# Altium PCB CW308T_PSoC62.PcbDoc
Units mil, origin at the board's own origin, x right, y up, seen from the top; angles counter-clockwise.
Board outline 2055 x 2540 mil, 2 copper layers (Top Layer, Bottom Layer); 22 components, 27 nets, 233 pads, 38 vias.
Unrouted connection lines stored in the file: 2.
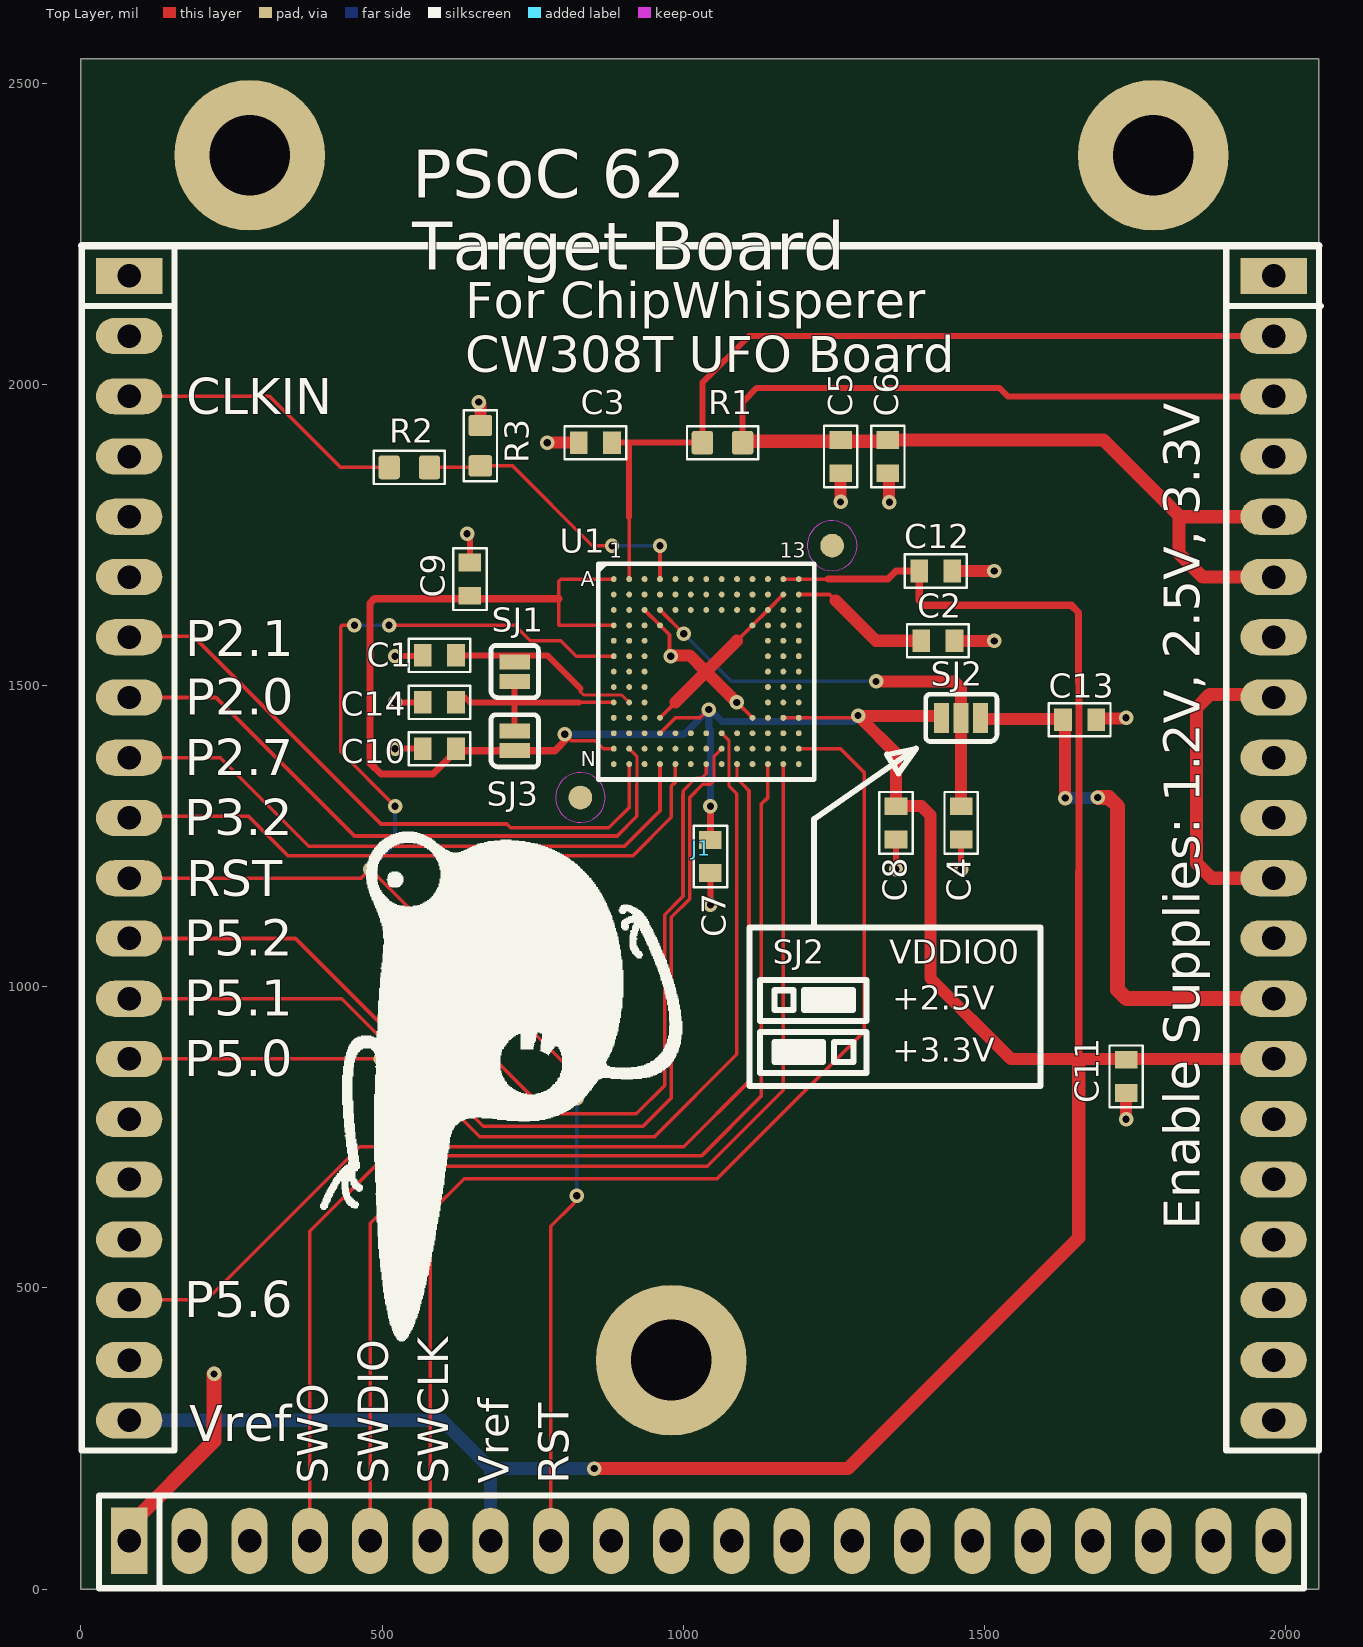
[diagram p0: Top Layer view]
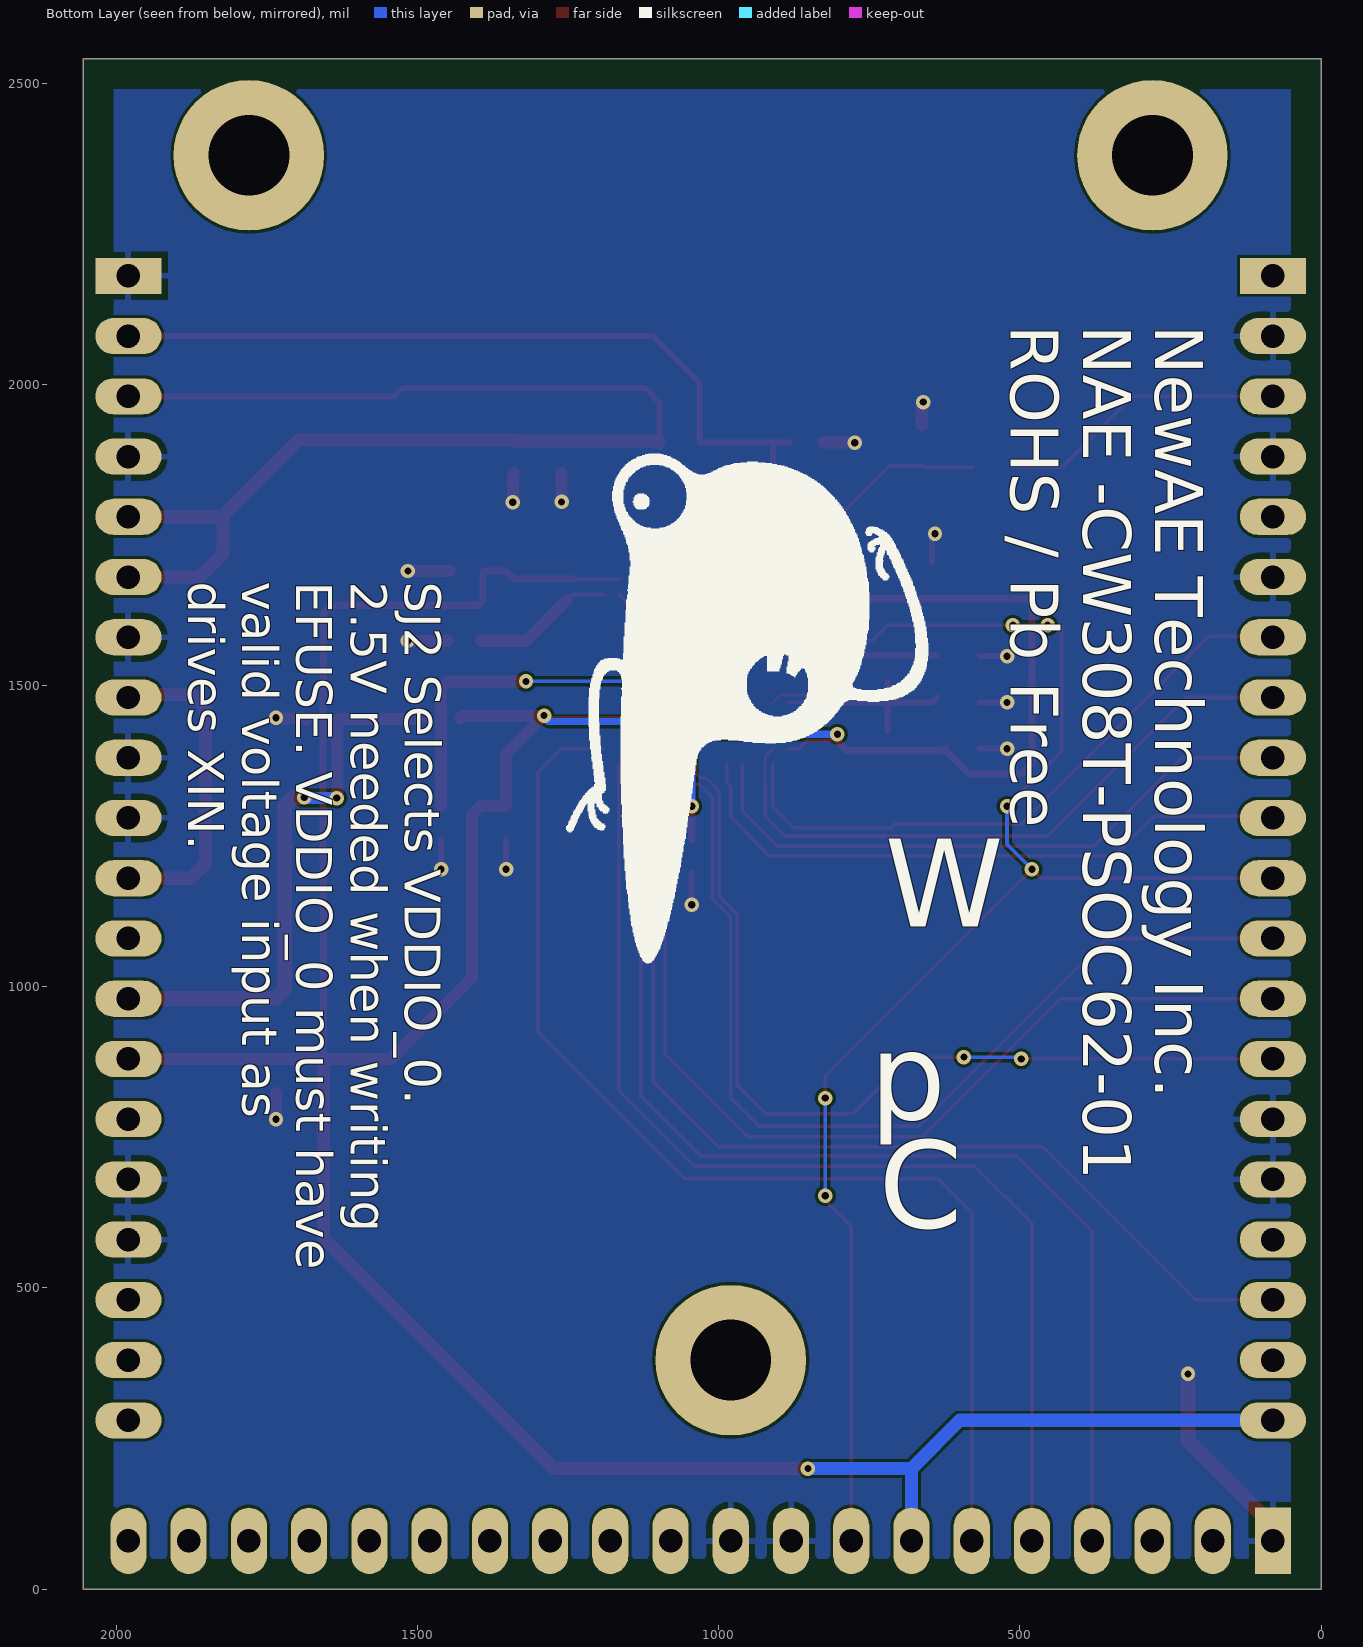
[diagram p1: Bottom Layer view, seen from below]

## Layer stack, top to bottom
Top Solder: solder mask 0.4, Solder Resist, Dk 3.5
Top Layer: signal copper 1.4
Dielectric 1: dielectric 12.6, FR-4, Dk 4.8
Bottom Layer: signal copper 1.4
Bottom Solder: solder mask 0.4, Solder Resist, Dk 3.5

## Board outline
0,0 0,2540 2055,2540 2055,0

## Design rules (kind name [scope] priority, off if disabled: settings)
BoardOutlineClearance Silk_to_Outline [(OnLayer('Top Overlay'))] p1: gap=0 ignorepadtopadclearanceinfootprint=FALSE
BoardOutlineClearance [All] p2: gap=50 ignorepadtopadclearanceinfootprint=FALSE
Clearance [All] p1: gap=5 ignorepadtopadclearanceinfootprint=FALSE except(0: Arc-Hole Track-Hole SMDPad-Hole THPad-Hole Via-Hole Fill-Hole Poly-Hole Region-Hole Text-Hole)
HoleSize [All] p1: absolutevalues=TRUE maxlimit=200 minlimit=1 maxpercent=80.000 minpercent=20.000
MinimumSolderMaskSliver [All] p1: minsoldermaskwidth=5
PlaneConnect PlaneConnect_viaDirect [IsVia] p1: planeconnectstyle=Direct reliefexpansion=20 reliefentries=4 reliefconductorwidth=10 reliefairgap=10
PlaneConnect [All] p2: planeconnectstyle=Relief reliefexpansion=20 reliefentries=4 reliefconductorwidth=10 reliefairgap=10
PolygonConnect PolygonConnect_viaDirect [All vs isVia] p1: connectstyle=Direct reliefconductorwidth=10 reliefentries=4 polygonreliefangle="90 Angle" airgapwidth=10
PolygonConnect [All] p2: connectstyle=Relief reliefconductorwidth=10 reliefentries=4 polygonreliefangle="90 Angle" airgapwidth=10
RoutingVias [All] p1: holewidth=28 width=50 viastyle="Through Hole" minholewidth=12 minwidth=11.81 maxholewidth=28 maxwidth=300 useviatemplates=TRUE viatemplateguid#1={883BC67F-0BAB-4236-9748-A0FFC80E06F3} viatemplateguid#2={EC4B1443-3223-4F3C-BEE6-1F1A4B72CE8F} viatemplateguid#3={1AFF5C45-7DD9-4486-91C1-9BFD7A8408A9} viatemplatename#1=v61h30m0mx0 viatemplatename#2=v86h41m0mx0 viatemplatename#3=v127h71m0mx0
SilkToSilkClearance [All] p1: silktosilkclearance=5
SilkToSolderMaskClearance [IsPad] p1: minsilkscreentomaskgap=5 clearancetoexposedcopper=TRUE
SolderMaskExpansion [All] p1: expansion=4
Width [All] p1: maxlimit=100 minlimit=5 preferedwidth=10 minimp=50.000000 maximp=50.000000 favimp=50.000000
25 further rules are at their usual default settings.

## Classes and differential pairs
component class CW308T_PSoC62_UFO: J1 R2 R3
component class CW308T_PSoC62_MCU: C1 C2 C3 C4 C5 C6 C7 C8 C9 C10 C11 C12 C13 C14 R1 SJ1 SJ2 SJ3 U1

## Components (designator, comment, footprint, x,y, rotation, side; value= is the part's Value field where it differs from the comment)
C1 "100n" CAPC0603_M 595,1550 r180 top
C2 "100n" CAPC0603_M 1422.44,1574.18 r0 top
C3 "DNM" CAPC0603_M 853.95,1903 r180 top
C4 "100n" CAPC0603_M 1461,1272.05 r270 top
C5 "100n" CAPC0603_M 1260.95,1880 r270 top
C6 "2u2" CAPC0603_M 1339.54,1880 r270 top
C7 "100n" CAPC0603_M 1045,1216 r270 top
C8 "100n" CAPC0603_M 1353,1272.05 r270 top
C9 "100n" CAPC0603_M 645.74,1676.54 r90 top
C10 "100n" CAPC0603_M 595,1395.05 r180 top
C11 "2u2" CAPC0603_M 1735,851 r270 top
C12 "2u2" CAPC0603_M 1419,1690 r0 top
C13 "2u2" CAPC0603_M 1658,1443 r0 top
C14 "100n" CAPC0603_M 595,1471.82 r180 top
J1 "CW308_TARGETCON" CW308_TBOARD_CONN 80,2180 r0 top locked
R1 "10R" RESC1608X55N 1065,1903 r0 top
R2 "22R" RESC1608X55N 545,1862 r180 top
R3 "100R" RESC1608X55N 663,1898 r270 top
SJ1 "NO" SJ_2S_NO 720,1523 r90 top
SJ2 "NC" SJ_3S_NC12 1461,1446.23 r180 top
SJ3 "NO" SJ_2S_NO 720,1408 r90 top
U1 "CY8C6246BZI-D04" BGA124C65P13X13_900X900X100 1038,1523 r0 top

## Footprints (in the part's own frame and the unit in brackets; to place one, negate y for a bottom-side part, rotate by r counter-clockwise, add the part's x,y. Pads: shape width x height; smd on the part's side, far side on the other; paste and mask are expansions set on the pad)
BGA124C65P13X13_900X900X100 [mm]
  round 0.25 smd mask+0.05: A1(-3.9,3.9) A2(-3.25,3.9) A3(-2.6,3.9) A4(-1.95,3.9) A5(-1.3,3.9) A6(-0.65,3.9) A7(0,3.9) A8(0.65,3.9) A9(1.3,3.9) A10(1.95,3.9) A11(2.6,3.9) A12(3.25,3.9) A13(3.9,3.9) B1(-3.9,3.25) B2(-3.25,3.25) B3(-2.6,3.25) B4(-1.95,3.25) B5(-1.3,3.25) B6(-0.65,3.25) B7(0,3.25) B8(0.65,3.25) B9(1.3,3.25) B10(1.95,3.25) B11(2.6,3.25) B12(3.25,3.25) B13(3.9,3.25) C1(-3.9,2.6) C2(-3.25,2.6) C3(-2.6,2.6) C4(-1.95,2.6) C5(-1.3,2.6) C6(-0.65,2.6) C7(0,2.6) C8(0.65,2.6) C9(1.3,2.6) C10(1.95,2.6) C11(2.6,2.6) C12(3.25,2.6) C13(3.9,2.6) D1(-3.9,1.95) D2(-3.25,1.95) D3(-2.6,1.95) D4(-1.95,1.95) D10(1.95,1.95) D11(2.6,1.95) D12(3.25,1.95) D13(3.9,1.95) E1(-3.9,1.3) E2(-3.25,1.3) E3(-2.6,1.3) E11(2.6,1.3) E12(3.25,1.3) E13(3.9,1.3) F1(-3.9,0.65) F2(-3.25,0.65) F3(-2.6,0.65) F11(2.6,0.65) F12(3.25,0.65) F13(3.9,0.65) G1(-3.9,0) G2(-3.25,0) G3(-2.6,0) G11(2.6,0) G12(3.25,0) G13(3.9,0) H1(-3.9,-0.65) H2(-3.25,-0.65) H3(-2.6,-0.65) H11(2.6,-0.65) H12(3.25,-0.65) H13(3.9,-0.65) J1(-3.9,-1.3) J2(-3.25,-1.3) J3(-2.6,-1.3) J11(2.6,-1.3) J12(3.25,-1.3) J13(3.9,-1.3) K1(-3.9,-1.95) K2(-3.25,-1.95) K3(-2.6,-1.95) K4(-1.95,-1.95) K10(1.95,-1.95) K11(2.6,-1.95) K12(3.25,-1.95) K13(3.9,-1.95) L1(-3.9,-2.6) L2(-3.25,-2.6) L3(-2.6,-2.6) L4(-1.95,-2.6) L5(-1.3,-2.6) L6(-0.65,-2.6) L7(0,-2.6) L8(0.65,-2.6) L9(1.3,-2.6) L10(1.95,-2.6) L11(2.6,-2.6) L12(3.25,-2.6) L13(3.9,-2.6) M1(-3.9,-3.25) M2(-3.25,-3.25) M3(-2.6,-3.25) M4(-1.95,-3.25) M5(-1.3,-3.25) M6(-0.65,-3.25) M7(0,-3.25) M8(0.65,-3.25) M9(1.3,-3.25) M10(1.95,-3.25) M11(2.6,-3.25) M12(3.25,-3.25) M13(3.9,-3.25) N1(-3.9,-3.9) N2(-3.25,-3.9) N3(-2.6,-3.9) N4(-1.95,-3.9) N5(-1.3,-3.9) N6(-0.65,-3.9) N7(0,-3.9) N8(0.65,-3.9) N9(1.3,-3.9) N10(1.95,-3.9) N11(2.6,-3.9) N12(3.25,-3.9) N13(3.9,-3.9)
  round 1 smd mask+0.5: ""(-5.309,-5.309) ""(5.309,5.309)
  Top Layer keep-out circle w0.05: c-5.309,-5.309 r1.051
  Top Layer keep-out circle w0.05: c5.309,5.309 r1.051
  silkscreen extent -4.55,-4.55 4.55,4.55, body extent -4.55,-4.55 4.55,4.55, height 1
CAPC0603_M [mm]
  rect 0.75x0.95 smd: 1(-0.7,0) 2(0.7,0)
  silkscreen extent -1.3,-0.7 1.3,0.7, body extent -0.85,-0.45 0.85,0.45, height 0.9
CW308_TBOARD_CONN [mil]
  rect 110x60 hole 39: A1(0,0) C1(1900,0)
  oval 110x60 hole 39: A2(0,-100) A3(0,-200) A4(0,-300) A5(0,-400) A6(0,-500) A7(0,-600) A8(0,-700) A9(0,-800) A10(0,-900) A11(0,-1000) A12(0,-1100) A13(0,-1200) A14(0,-1300) A15(0,-1400) A16(0,-1500) A17(0,-1600) A18(0,-1700) A19(0,-1800) A20(0,-1900) C2(1900,-100) C3(1900,-200) C4(1900,-300) C5(1900,-400) C6(1900,-500) C7(1900,-600) C8(1900,-700) C9(1900,-800) C10(1900,-900) C11(1900,-1000) C12(1900,-1100) C13(1900,-1200) C14(1900,-1300) C15(1900,-1400) C16(1900,-1500) C17(1900,-1600) C18(1900,-1700) C19(1900,-1800) C20(1900,-1900)
  rect 60x110 hole 39: B1(0,-2100)
  oval 60x110 hole 39: B2(100,-2100) B3(200,-2100) B4(300,-2100) B5(400,-2100) B6(500,-2100) B7(600,-2100) B8(700,-2100) B9(800,-2100) B10(900,-2100) B11(1000,-2100) B12(1100,-2100) B13(1200,-2100) B14(1300,-2100) B15(1400,-2100) B16(1500,-2100) B17(1600,-2100) B18(1700,-2100) B19(1800,-2100) B20(1900,-2100)
  round 250 hole 134: MH1(200,200) MH2(900,-1800) MH2(1700,200)
  silkscreen extent -79,-2179 1979,50, body extent -50,-2149 1950,50, height 48
RESC1608X55N [mm] "Chip Resistor, Body 1.6x0.8mm, EIA 0603, IPC Medium Density"
  round 0.254 on Mech15: 0(0,0)
  rrect25% 0.9x1 smd: 1(-0.85,0) 2(0.85,0)
  Top Layer pour cut-out: -0.6,0.5 0.6,0.5 0.6,-0.5 -0.6,-0.5
  silkscreen extent -1.5,-0.7 1.5,0.7, body extent -0.87,-0.47 0.88,0.48, height 0.54
SJ_2S_NO [mil] "Solder Jumper, open (no paste)"
  rect 25x50 smd paste-393.7: 1(-16.22,0) 2(16.22,0)
  silkscreen extent -43,-39 43,39
SJ_3S_NC12 [mil] "3-Way Solder Jumper, pads 1-2 closed"
  rect 25x50 smd: 1(-32.43,0) 2(0,0)
  rect 25x50 smd paste-393.7: 3(32.44,0)
  silkscreen extent -60,-39 59,39

## Part data
C1 C2 C4 C5 C7 C8 C9 C10 C14: library part CCHIP-100n-0603, "100n, 0603", Case-EIA=0603, Case-Metric=1608, Manufacture 1=Kemet, Manufacture Part Number 1=C0603C104K5RACTU, Rated Voltage=50VDC, Supplier Part Number 1=399-5089-2-ND, Component Group=Capacitor, Component Type=Standard, Mounting Technology=SMT, Part Number=CCHIP-100n-0603, Pin Count=2, Supplier 1=Digi-Key
C3: library part CCHIP-DNM-0603, "DNM, 0603", Case-EIA=0603, Component Group=Capacitor, Component Type=Standard, Mounting Technology=SMT, Part Number=CCHIP-DNM-0603, Pin Count=2
C6 C11 C12 C13: library part CCHIP-2u2-0603, "2u2, 0603", Case-EIA=0603, Case-Metric=1608, Manufacture 1=Samsung, Manufacture Part Number 1=CL10B225KP8NNNC, Rated Voltage=10VDC, Supplier Part Number 1=1276-1134-2-ND, Component Group=Capacitor, Component Type=Standard, Mounting Technology=SMT, Part Number=CCHIP-2u2-0603, Pin Count=2, Supplier 1=Digi-Key
J1: library part CW308_TBOARD, "CW308 \"Standard\" Target Board Connector", Component Group=Mechanical, Component Type=Standard, Mounting Technology=Through-hole, Part Number=CW308_TBOARD, Pin Count=60, Pitch=2.54mm
R1: library part RCHIP-10R-0603, "10R res, 0603, 1%, 1/10W", Case-EIA=0603, Case-Metric=1608, Manufacture 1=Yageo, Manufacture Part Number 1=RC0603FR-0710RL, Rated Power=0.1W, Rated Voltage=75VDC, Supplier Part Number 1=311-10.0HRCT-ND, Temperature Range="-55C to 155C", Tolerance=1%, Component Group=Resistor, Component Type=Standard, Mounting Technology=SMT, Part Number=RCHIP-10R-0603, Pin Count=2, Supplier 1=Digi-Key
R2: library part RCHIP-22R-0603, "22R res, 0603, 1%, 1/10W", Case-EIA=0603, Case-Metric=1608, Manufacture 1=Yageo, Manufacture Part Number 1=RC0603FR-0722RL, Rated Power=0.1W, Rated Voltage=75VDC, Supplier Part Number 1=311-22.0HRCT-ND, Temperature Range="-55C to 155C", Tolerance=1%, Component Group=Resistor, Component Type=Standard, Mounting Technology=SMT, Part Number=RCHIP-22R-0603, Pin Count=2, Supplier 1=Digi-Key
R3: library part RCHIP-100R-0603, "100R res, 0603, 1%, 1/10W", Case-EIA=0603, Case-Metric=1608, Manufacture 1=Yageo, Manufacture Part Number 1=RC0603FR-07100RL, Rated Power=0.1W, Rated Voltage=75VDC, Supplier Part Number 1=311-100HRCT-ND, Temperature Range="-55C to 155C", Tolerance=1%, Component Group=Resistor, Component Type=Standard, Mounting Technology=SMT, Part Number=RCHIP-100R-0603, Pin Count=2, Supplier 1=Digi-Key
SJ1 SJ3: library part SJ_2S_NO, "Solder Jumper, NO", Component Group="PCB Feature", Component Type="Standard (No BOM)", Mounting Technology=COPPER, Part Number=SJ_2S_NO, Pin Count=2
SJ2: library part SJ_3S_12JMP, "Solder Jumper, NC", Component Group="PCB Feature", Component Type="Standard (No BOM)", Mounting Technology=COPPER, Part Number=SJ_3S_12JMP, Pin Count=3
U1: "IC DUAL CORE MCU 32B 512K 124BGA", Manufacture 1="Cypress Semiconductors", Component Group="Digital IC", Component Type=Standard, Manufacture Part Number 1=CY8C6246BZI-D04, Mounting Technology=SMT, Part Number=CY8C6246BZI-D04, Pin Count=124, PP Material Stack=0, PP Rotation=0, RoHS=Yes, Supplier 1=Digi-Key, Supplier Part Number 1=CY8C6246BZI-D04

## Via types
v1: diameter 24, hole 12, Top Layer to Bottom Layer, tented both sides, 38 vias

## Nets (pads, with @x,y where several pads share a name; then routed paths per layer and width w, separated by ;. In a path a pad name is that pad's centre, name@x,y a point inside that pad or via, vN(x,y) a via of type N, cw(c..) or ccw(c..) an arc to the next point about the centre after c; other vN are vias at no path point)
CS: J1.A18 U1.N9 | length 1714.3
  Top Layer w5: U1.N9 1089.18,1345.13 1098.46,1335.84
  Top Layer w6: J1.A18 209,480 463,734 1000.41,734 1109,842.59 1109,1325.31 1098.46,1335.84
GND: C1.2 C2.2 C3.2 C4.2 C5.2 C6.2 C7.2 C8.2 C9.2 C10.2 C11.2 C12.2 C13.2 C14.2 J1.A2 J1.A4 J1.A6 J1.A15 J1.A16 J1.B1 J1.B9 J1.B10 J1.C1 J1.C4 J1.C7 J1.C9 J1.C10 J1.C16 J1.C17 R3.1 U1.B12 U1.C3 U1.C11 U1.D4 U1.D10 U1.K4 U1.K10 | length 1658.5
  Top Layer w6: U1.C3 U1.D4 977,1584 v1@977,1550 ; U1.K4 986.82,1471.82 ; 1088.62,1574.18 1089.18,1574.18 U1.D10 U1.C11 U1.B12 ; v1@1089.18,1471.82 U1.K10
  Top Layer w10: v1(521.38,1395.05) C10.2 ; v1(521.38,1471.82) C14.2 ; v1(521.38,1548.59) 566.03,1548.59 C1.2 ; v1(641,1752) 641,1751.74 645.74,1747 C9.2 ; v1@977,1550 v1@978.41,1548.59 ; v1(1045,1136) C7.2 ; v1(1353,1195) C8.2 ; v1(1461,1195) C4.2
  Top Layer w20: v1(660.46,1970.46) 663,1967.93 R3.1 ; v1(774.05,1903) C3.2 ; v1@978.41,1548.59 979.17,1549.36 999.95,1549.36 1000.59,1550 1010.44,1550 1037.58,1522.86 ; 986.82,1471.82 986.82,1472.1 1037.58,1522.86 ; v1(1088.62,1471.82) 1037.58,1522.86 ; 1088.62,1574.18 1088.62,1573.9 1037.58,1522.86 ; v1(1260.95,1804.77) C5.2 ; C6.2 1341.23,1850.75 1341.23,1804.77 v1(1342,1804) ; C12.2 v1(1516,1690) ; C2.2 1450.14,1574.04 1515.86,1574.04 v1(1516,1573.9) ; C13.2 1688.02,1445.46 1734.23,1445.46 v1(1735,1446.23) ; v1(1735,780) C11.2
  Top Layer w25: J1.B1 80,105 221,246 v1(221,357)
  other v1: 979,1548.59
GPIO3: J1.A9 U1.N4 | length 1044.1
  Top Layer w6: J1.A9 231,1380 378,1233 902.36,1233 961.23,1291.87 U1.N4
GPIO4: J1.A10 U1.N5 | length 1046.4
  Top Layer w6: J1.A10 83,1283 278,1283 344,1217 916,1217 980,1281 980,1332.99 986.82,1339.81 U1.N5
LED1: J1.C18
LED2: J1.C19
LED3: J1.C20
MISO: J1.A13 U1.L8 | length 1703.5
  Top Layer w5: U1.L8 1076.01,1408.22 1076.01,1332.99 1077,1332
  Top Layer w6: J1.A13 433,980 662,751 952,751 1088.62,887.62 1088.62,1320.38 1077,1332
MOSI: J1.A14 U1.N7 | length 1516.2
  Top Layer w5: 999.95,1325.31 1020.98,1346.34 1030.34,1346.34 1038,1354 U1.N7
  Top Layer w6: v1(80,880) v1(497.98,880) ; v1(593,883) 683,883 777,789 922,789 969,836 969,1119.56 999.44,1150 999.44,1318.54 999.95,1319.05 999.95,1325.31
  Bottom Layer w6: v1(497.98,880) 500.98,883 v1(593,883)
NetC1_1: C1.1 SJ1.2 U1.J2 | length 307.9
  Top Layer w5: 828.98,1489.94 834.69,1484.24 897.63,1484.24 U1.J2
  Top Layer w6: 828.98,1489.94 828.98,1495.07
  Top Layer w10: 637.56,1550 774.05,1550 828.98,1495.07
NetC2_1: C2.1 U1.B13 | length 235.1
  Top Layer w6: U1.B13 1243.05,1650.95 1253,1641
  Top Layer w20: 1253,1641 1319.82,1574.18 C2.1
NetC4_1: C4.1 SJ2.2 U1.C4 | length 749.2
  Top Layer w6: U1.C4 v1(1000.59,1586)
  Top Layer w20: v1(1320,1506.78) 1449.28,1506.78 1461,1495.07 SJ2.2 C4.1
  Bottom Layer w6: v1(1000.59,1586) 1079.81,1506.78 v1(1320,1506.78)
NetC14_1: C14.1 SJ1.1 SJ3.2 U1.J1 | length 332.9
  Top Layer w6: 826.39,1471.82 U1.J1
  Top Layer w10: 637.56,1480 645.74,1471.82 720,1471.82 ; SJ3.2 720,1471.82 ; SJ1.1 720,1471.82 ; 826.39,1471.82 720,1471.82
NetJ1_A3: J1.A3 R2.2 | length 480.4
  Top Layer w6: J1.A3 313,1980 431,1862 R2.2
RST: J1.A11 J1.B8 U1.F1 | length 2598.9
  Top Layer w6: J1.A11 465,1180 v1(480,1195) 823,852 v1(823,815) ; v1(454,1599.77) 433,1599.77 431,1597.77 431,1389.98 v1(521.38,1299.61) ; v1(511.54,1599.77) 720,1599.77 745.59,1574.18 796.51,1574.18 822.11,1548.59 U1.F1 ; J1.B8 780,602 818,640
  Bottom Layer w6: v1(454,1599.77) v1(511.54,1599.77) ; v1(480,1195) 521.38,1236.38 v1(521.38,1299.61) ; v1(823,653) v1(823,815)
RX: J1.A8 U1.M2 | length 1069.2
  Top Layer w5: U1.M2 922.84,1382.25 922.84,1335.84
  Top Layer w6: J1.A8 224,1480 454,1250 890.05,1250 922.84,1282.8 922.84,1335.84
SCK: J1.A12 U1.M8 | length 1670.8
  Top Layer w5: 1045,1335.84 1051.17,1342.01 1051.17,1382.63 U1.M8
  Top Layer w6: J1.A12 356,1080 668,768 933,768 980,815 980,1115 1010.44,1145.44 1010.44,1313.98 1032.3,1335.84 1045,1335.84
SHUNTH: C5.1 C6.1 J1.C3 J1.C5 J1.C6 R1.2 | length 2135.8
  Top Layer w10: R1.2 1098.46,1970.46 1122,1994 1524.74,1994 1538.74,1980 J1.C3
  Top Layer w22: R1.2 1100.74,1905.28 1337.26,1905.28 C6.1 1697.44,1907.56 1825,1780 ; J1.C6 1862,1680 1823,1719 1823,1778 1825,1780 ; J1.C5 1825,1780
SHUNTL: C3.1 J1.C2 R1.1 U1.A2 | length 1456.6
  Top Layer w6: U1.A2 910.05,1780
  Top Layer w10: C3.1 910.05,1903 ; 910.05,1780 910.05,1903 ; J1.C2 1109,2080 1031.54,2002.54 R1.1 910.05,1903
SWCLK: J1.B6 U1.M13 | length 1944.9
  Top Layer w6: J1.B6 580,625 636,681 1056,681 1300,925 1300,1356 1260.95,1395.05 U1.M13
SWDIO: J1.B5 U1.N12 | length 1845.8
  Top Layer w6: J1.B5 480,607 575,702 1039.77,702 1165.95,828.18 U1.N12
SWO: J1.B4 U1.N11 | length 1911.9
  Top Layer w6: J1.B4 380,593.97 505.03,719 1030,719 1129,818 1129,1302.62 1140.36,1313.98 U1.N11
TX: J1.A7 U1.N2 | length 1048.8
  Top Layer w6: J1.A7 82,1582 185.98,1582 497.98,1270 707,1270 713.36,1263.64 876.27,1263.64 910.05,1297.42 U1.N2
VCC1V2: J1.C8 J1.C11 | length 535.5
  Top Layer w22: J1.C11 1877,1180 1852,1205 1852,1463 1874,1485 1975,1485 J1.C8
VCC2V5: C13.1 J1.C13 SJ2.1 | length 933.1
  Top Layer w20: SJ2.1 1495.05,1444.61 1628.83,1444.61 C13.1 1633.23,1440.21 1633.23,1313.77 v1(1634,1313)
  Top Layer w25: v1(1688.02,1313.98) 1706.36,1313.98 1721,1299.34 1721,994.64 1735.64,980 J1.C13
  Bottom Layer w20: v1(1634,1313) 1634.49,1313.49 1687.53,1313.49 v1(1688.02,1313.98)
VCC3V3: C7.1 C8.1 C9.1 C10.1 C11.1 C12.1 J1.A20 J1.B7 J1.C14 SJ2.3 SJ3.1 U1.A1 U1.A12 U1.A13 U1.D1 U1.K12 U1.K13 U1.L4 U1.M1 | length 7004.6
  Top Layer w6: v1@808.5,1413.5 814,1408 853.95,1408 866.91,1395.05 U1.M1 ; U1.D1 793,1599.77 793,1643.89 793,1673.03 796.51,1676.54 U1.A1 ; U1.L4 986.82,1446.23 1028.23,1446.23 v1(1042,1460) ; U1.K12 U1.K13 v1@1293.77,1446.23 ; U1.A12 U1.A13 1240.46,1676.54
  Top Layer w12: 793,1643.89 487.03,1643.89 480,1636.86 480,1371 498,1353 584.45,1353 622.56,1391.11 C10.1 625.82,1391.78 SJ3.1 786.78,1391.78 v1@808.5,1413.5 ; C7.1 v1(1045,1299.61) ; 1240.46,1676.54 1339.54,1676.54 1353,1690 C12.1 1391.44,1641 1399.44,1633 1644,1633 1656,1621 1656,1505.37 1657,1504.37 1657,1192.58 1656.2,1191.79 1656.2,880 ; J1.C14@1965,880 J1.C14
  Top Layer w20: v1(1290,1450) v1@1290.77,1449.23 ; SJ2.3 1428.56,1446.73 1426.06,1449.23 v1@1290.77,1449.23 ; J1.C14@1965,880 1656.2,880 1544,880 1410,1014 1410,1285 1395.39,1299.61 C8.1 1353,1387 1293.77,1446.23 v1@1290.77,1449.23
  Top Layer w22: v1(852,200) 1273,200 1656.2,583.2 1656.2,880
  Bottom Layer w12: v1(803,1419) 1001,1419 v1(1042,1460) ; v1(1045,1299.61) 1045,1427 1042,1430 v1(1042,1460) ; v1(1290,1450) 1290,1447.03 1282.97,1440 1064.43,1440 1044.43,1460 v1(1042,1460)
  Bottom Layer w22: J1.A20 600,280 680,200 ; J1.B7 680,200 ; v1(852,200) 680,200
XIN: R2.1 R3.2 U1.A4 | length 494.2
  Top Layer w6: R2.1 660.46,1862 R3.2 716.46,1864.54 848.98,1732.02 v1(881.51,1732.04) ; U1.A4 v1(961.23,1732.04)
  Bottom Layer w6: v1(881.51,1732.04) v1(961.23,1732.04)
pads on no net: J1.A1 J1.A5 J1.A17 J1.A19 J1.B2 J1.B3 J1.B11 J1.B12 J1.B13 J1.B14 J1.B15 J1.B16 J1.B17 J1.B18 J1.B19 J1.B20 J1.C12 J1.C15 J1.MH1 J1.MH2 R1.0 R2.0 R3.0 U1. U1.A3 U1.A5 U1.A6 U1.A7 U1.A8 U1.A9 U1.A10 U1.A11 U1.B1 U1.B2 U1.B3 U1.B4 U1.B5 U1.B6 U1.B7 U1.B8 U1.B9 U1.B10 U1.B11 U1.C1 U1.C2 U1.C5 U1.C6 U1.C7 U1.C8 U1.C9 U1.C10 U1.C12 U1.C13 U1.D2 U1.D3 U1.D11 U1.D12 U1.D13 U1.E1 U1.E2 U1.E3 U1.E11 U1.E12 U1.E13 U1.F2 U1.F3 U1.F11 U1.F12 U1.F13 U1.G1 U1.G2 U1.G3 U1.G11 U1.G12 U1.G13 U1.H1 U1.H2 U1.H3 U1.H11 U1.H12 U1.H13 U1.J3 U1.J11 U1.J12 U1.J13 U1.K1 U1.K2 U1.K3 U1.K11 U1.L1 U1.L2 U1.L3 U1.L5 U1.L6 U1.L7 U1.L9 U1.L10 U1.L11 U1.L12 U1.L13 U1.M3 U1.M4 U1.M5 U1.M6 U1.M7 U1.M9 U1.M10 U1.M11 U1.M12 U1.N1 U1.N3 U1.N6 U1.N8 U1.N10 U1.N13

## Polygon pours and split planes (outlines as drawn)
GND on Bottom Layer "GND_L02_P004" (solid, remove dead copper, pour order 4): -2,2539 2050,2539 2050,0 0,0
no net on Top Overlay (solid): 1149.87,907.5 1231.87,907.5 1231.87,874.5 1149.87,874.5
no net on Top Overlay (solid): 1200,994 1282,994 1282,961 1200,961

## Silkscreen, mask and mechanical layers (free items; w line width, h text height)
Top Overlay:
  drawing of 41 lines, arcs and shapes, not listed
  text "PSoC 62 / Target Board" at 550,2190 h80
  text "For ChipWhisperer / CW308T UFO Board" at 637.56,2020 h60
  text "CLKIN" at 175,1950 h60
  text "P2.1" at 173,1548.59 h60
  text "P2.0" at 173,1451.31 h60
  text "P2.7" at 172,1351.31 h60
  text "P3.2" at 171,1251.31 h60
  text "RST" at 175,1150 h60
  text "P5.2" at 171,1051.31 h60
  text "SJ2" at 1148,1038 h40
  text "VDDIO0" at 1342,1038 h40
  text "+2.5V" at 1347,962 h40
  text "P5.1" at 171,951.31 h60
  text "+3.3V" at 1347,875 h40
  text "P5.0" at 171,851.31 h60
  text "Enable Supplies: 1.2V, 2.5V, 3.3V" at 1857,596 h60 r90
  text "P5.6" at 171,451.31 h60
  text "Vref" at 180,245 h60
  text "SWO" at 410,175 h50 r90
  text "SWDIO" at 510,175 h50 r90
  text "SWCLK" at 610,175 h50 r90
  text "Vref" at 710,175 h50 r90
  text "RST" at 810,175 h50 r90
Bottom Overlay:
  drawing of 2 lines, arcs and shapes, not listed
  text "NewAE Technology Inc. / NAE -CW308T-PSOC62-01 / ROHS / Pb Free" at 515,2098.35 h80 r90
  text "SJ2 Selects VDDIO_0. / 2.5V needed when writing / EFUSE. VDDIO_0 must have / valid voltage input as / drives XIN." at 1881,1672 h60 r90
  text "W" at 724,1051 h250
  text "p" at 749,731 h250
  text "C" at 734,551 h250
Mechanical 1:
  the board outline again, w11.81

## Text inside footprints (layer, text, board x,y; h text height)
U1: Top Overlay "A" at 829.34,1664.73 h25; Top Overlay "1" at 876.58,1711.98 h25; Top Overlay "13" at 1160.05,1711.98 h25; Top Overlay "N" at 829.34,1365.52 h25; Mechanical 13 "A" at 829.96,1665.67 h25; Mechanical 13 "N" at 829.34,1365.52 h25; Mechanical 13 "1" at 877.82,1710.56 h25; Mechanical 13 "13" at 1161.65,1711.57 h25